# Allegro board Main.brd
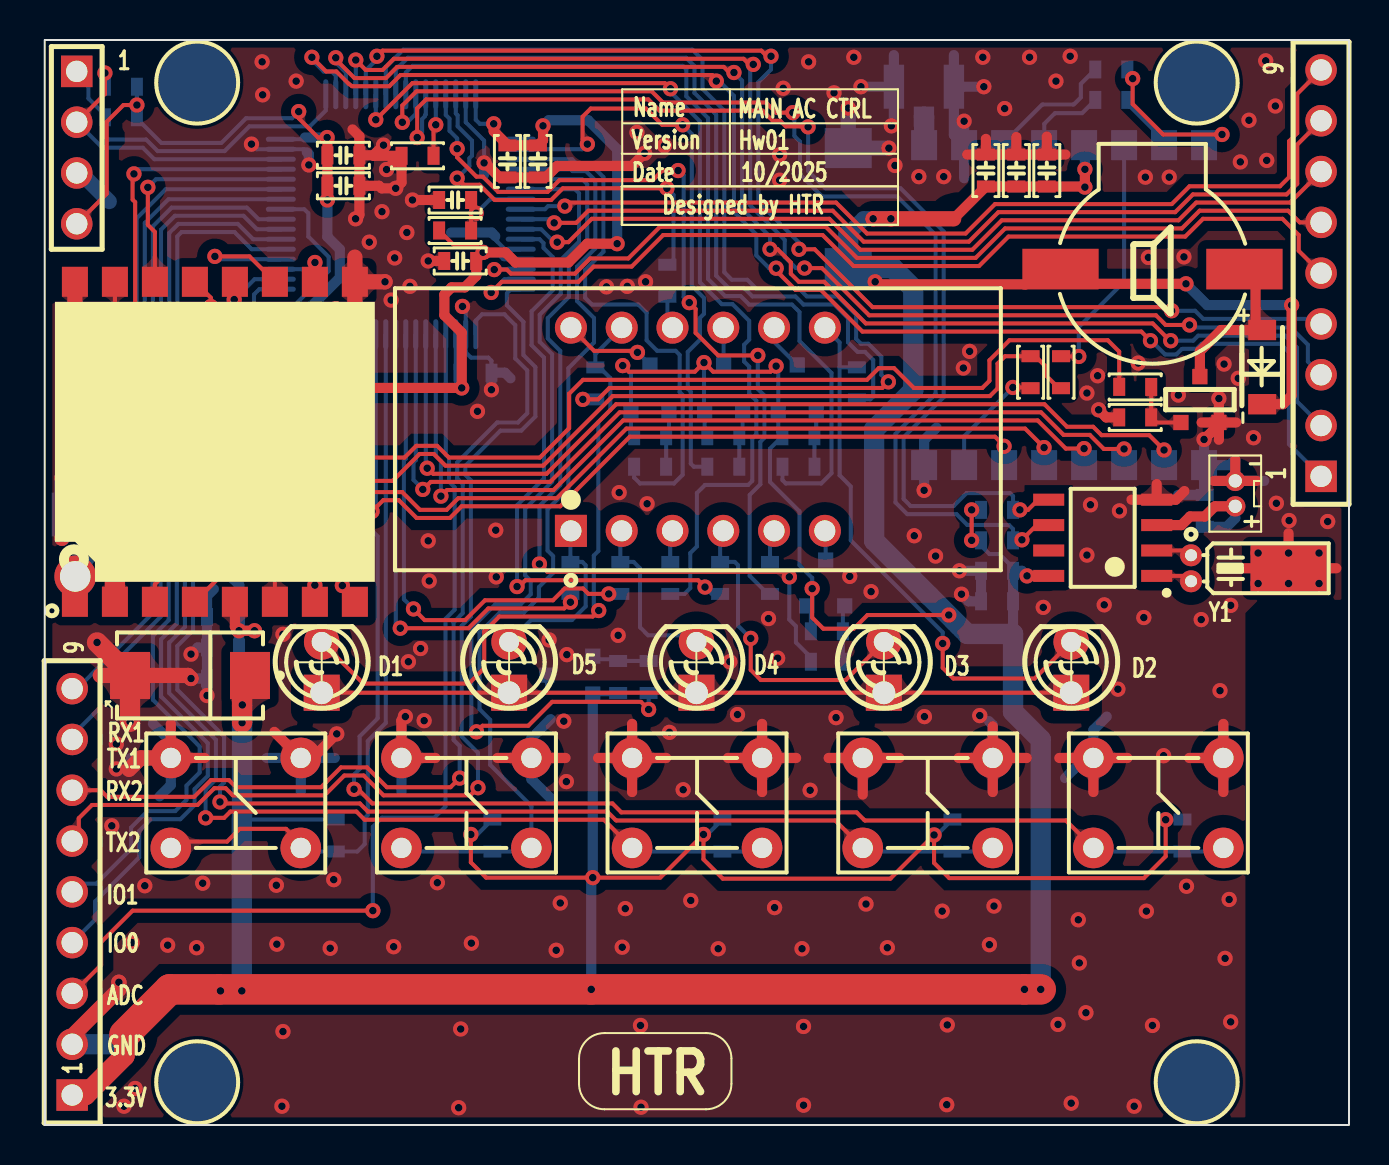
[diagram p0: board, top side]
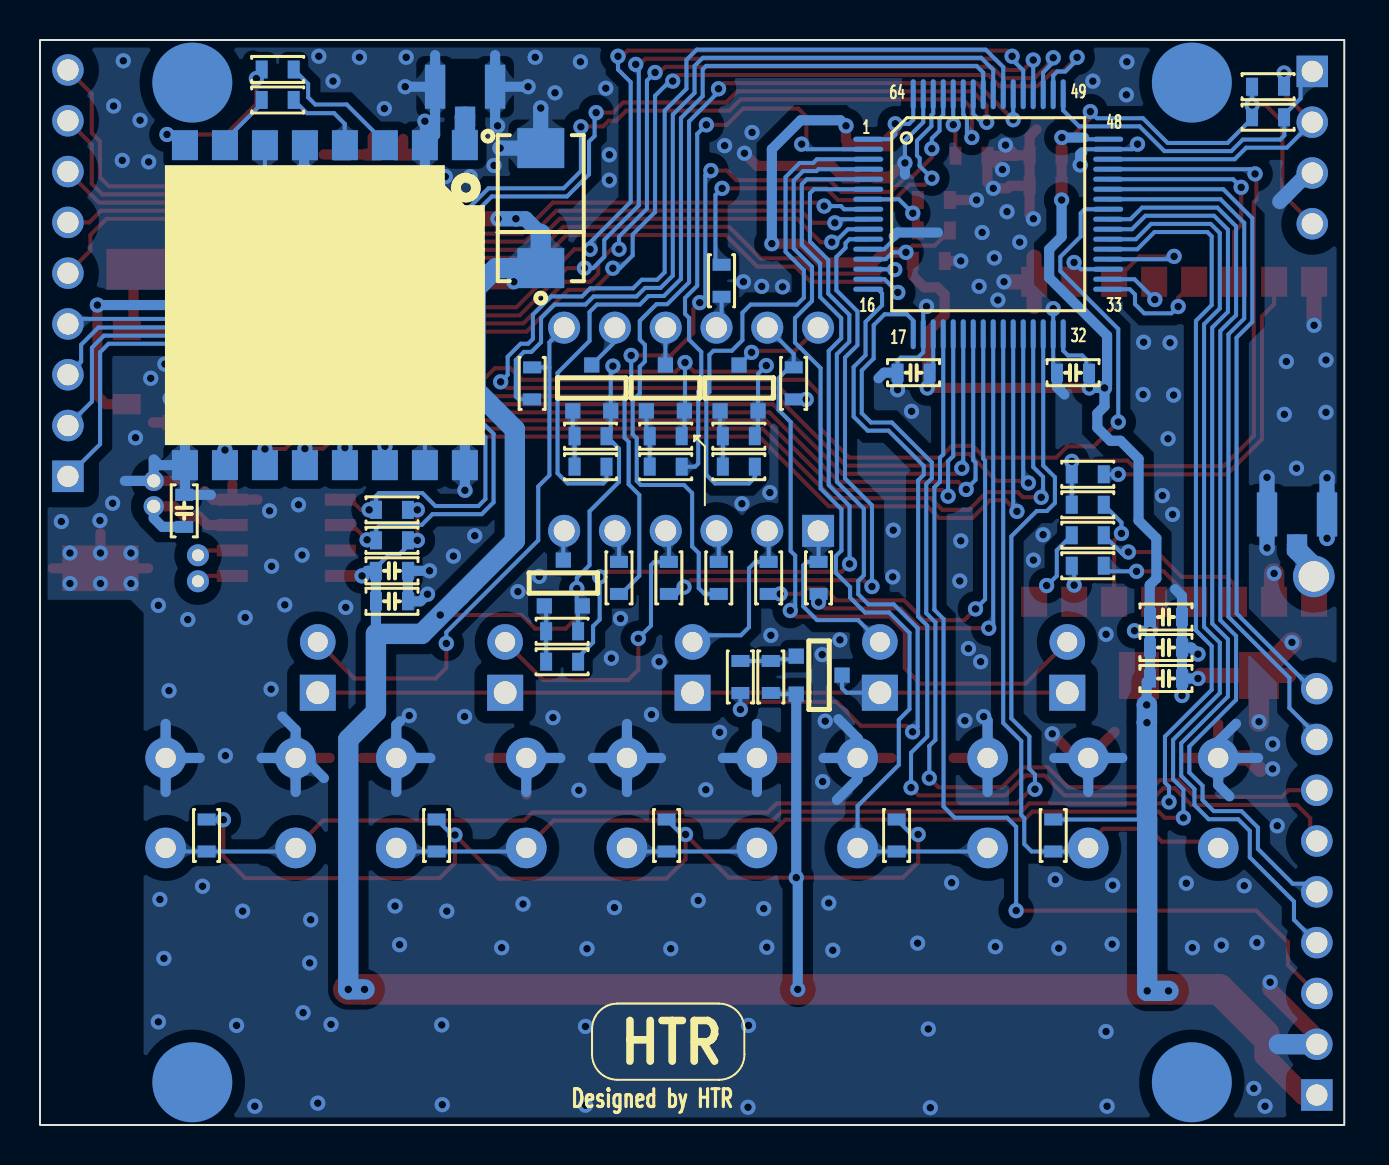
[diagram p1: board, bottom side, seen from below]

Outline 65.23 x 54.25 mm; copper layers: TOP, BOTTOM. Coordinates in mm from the lower left corner of the outline.
Outline path: rectangle 0,0 65.23,54.25

## Design rules (mm)
constraint set DEFAULT: min track width 0.203

## Placement (name value [footprint] x y rotation side)
B1  Through SMD  [BUZZER_SMD]  55.4 42.8 0 top
C1  0.1uF  [C0603]  23.14 48.18 90 top
C2  10uF  [C0603]  24.66 48.18 270 top
C3  0.1uF  [C0603]  20.78 43.21 0 top
C4  0.1uF  [C0603]  13.56 37.62 180 bottom
C5  0.1uF  [C0603]  21.54 37.62 180 bottom
C7  0.1uF  [C0603]  14.94 48.49 180 top
C8  10uF  [C0603]  14.94 46.96 0 top
C10  0.1uF  [C0603]  8.92 25.4 180 bottom
C11  1uF  [C0603]  8.92 23.88 180 bottom
C12  1uF  [C0603]  8.92 22.33 180 bottom
C13  0.1uF  [C0603]  20.52 46.25 0 top
C14  0.1uF  [C0603]  47.62 27.71 180 bottom
C15  1uF  [C0603]  47.62 26.19 0 bottom
C16  1uF  [C0603]  58.01 30.71 90 bottom
C17  100uF  [C2312]  7.26 22.48 180 top
C18  100uF  [C2312]  40.18 45.85 90 bottom
C23  0.1uF  [C0603]  50.11 47.73 90 top
C24  1uF  [C0603]  48.59 47.73 90 top
C25  1uF  [C0603]  47.07 47.73 90 top
D1  3mm  [LED3MM]  13.85 24.16 270 top
D2  3mm  [LED3MM]  51.34 24.16 270 top
D3  3mm  [LED3MM]  41.96 24.16 270 top
D4  3mm  [LED3MM]  32.59 24.16 270 top
D5  3mm  [LED3MM]  23.22 24.16 270 top
D6  1N4148  [SOD_123]  60.88 37.9 270 top
J1  -  [HEADER1X4]  1.6 48.9 180 top
J2  -  [HEADER1X9]  63.83 32.44 90 top
J3  Bat  [HEADER1X2_127_ZH_TH]  59.54 31.57 90 top
J6  -  [HEADER1X9]  1.37 1.5 90 top
NOREF  -  [unnamed]  57.61 2.14 0 top
NOREF#2  -  [#2]  32.61 16.1 90 top
NOREF#3  -  [unnamed]  7.62 52.12 0 top
NOREF#4  -  [unnamed]  7.62 2.14 0 top
NOREF#5  -  [unnamed]  57.61 52.12 0 top
NOREF#6  -  [#2]  10.37 16.47 0 top
NOREF#7  -  [#2]  35.94 23.14 90 top
Q1  MMBT3906  [SOT_23]  31.22 35.71 180 bottom
Q2  MMBT3906  [SOT_23]  34.9 35.71 180 bottom
Q3  MMBT3906  [SOT_23]  38.58 35.71 180 bottom
Q4  MMBT3906  [SOT_23]  40.01 25.96 180 bottom
Q5  MMBT3906  [SOT_23]  27.41 23.44 270 bottom
Q6  MMBT2222  [SOT_23]  56.82 35.13 0 top
R1  10K  [R0603]  20.52 44.73 0 top
R2  10K  [R0603]  18.64 48.46 180 top
R3  10K  [R0603]  3.81 51.92 0 bottom
R4  10K  [R0603]  3.81 50.39 0 bottom
R5  0  [R0603]  12.83 32.54 0 bottom
R6  0  [R0603]  12.83 27.97 0 bottom
R7  0  [R0603]  12.83 29.49 0 bottom
R8  0  [R0603]  12.83 31.01 180 bottom
R9  10K  [R0603]  30.28 34.44 0 bottom
R10  10K  [R0603]  33.93 34.44 0 bottom
R11  10K  [R0603]  37.69 34.44 0 bottom
R12  10K  [R0603]  39.12 24.69 0 bottom
R13  10K  [R0603]  28.68 22.4 90 bottom
R14  2.2K  [R0603]  30.2 22.4 270 bottom
R15  2.2K  [R0603]  30.28 32.92 180 bottom
R16  2.2K  [R0603]  33.93 32.92 180 bottom
R17  2.2K  [R0603]  37.69 32.92 180 bottom
R18  2.2K  [R0603]  39.12 23.16 180 bottom
R19  2.2K  [R0603]  27.53 37.08 270 bottom
R20  2.2K  [R0603]  40.61 37.08 270 bottom
R21  2.2K  [R0603]  33.78 27.36 270 bottom
R22  2.2K  [R0603]  28.78 27.36 270 bottom
R23  2.2K  [R0603]  26.29 27.36 270 bottom
R24  2.2K  [R0603]  31.14 42.21 90 bottom
R25  2.2K  [R0603]  36.27 27.36 270 bottom
R26  2.2K  [R0603]  31.28 27.36 270 bottom
R27  10K  [R0603]  14.55 14.48 270 bottom
R28  10K  [R0603]  22.39 14.48 270 bottom
R29  10K  [R0603]  33.89 14.48 270 bottom
R30  10K  [R0603]  45.39 14.48 270 bottom
R31  10K  [R0603]  56.9 14.48 270 bottom
R32  10K  [R0603]  47.62 30.76 0 bottom
R33  10K  [R0603]  47.62 29.24 0 bottom
R34  0  [R0603]  49.3 37.64 90 top
R35  2.2K  [R0603]  54.53 36.91 0 top
R36  10K  [R0603]  54.53 35.38 180 top
R37  0  [R0603]  53.34 51.26 0 bottom
R38  0  [R0603]  53.34 52.78 0 bottom
R39  0  [R0603]  50.83 37.64 90 top
SW1  Button  [SW_REC_6X6_4P_TH]  9.55 16.1 0 top
SW2  Button  [SW_REC_6X6_4P_TH]  21.09 16.1 0 top
SW3  Button  [SW_REC_6X6_4P_TH]  32.62 16.1 0 top
SW4  Button  [SW_REC_6X6_4P_TH]  44.16 16.1 0 top
SW5  Button  [SW_REC_6X6_4P_TH]  55.69 16.1 0 top
T1  Test_Point_Pwr_60  [TEST_POINT_PWR_60]  1.52 27.43 0 top
U1  STM32F103RD  [LQFP_64]  17.81 45.54 180 bottom
U2  SMD_MINI  [ANTENNA_MOUNT]  2.36 30.53 270 bottom
U3  RFM69HCW_868/RFM22B_433  [RFM22B_S2]  8.51 34.16 90 top
U4  LED  [LED_4_DIGIT]  32.66 34.79 90 top
U5  BQ32000  [SOIC8]  52.91 29.36 180 top
U6  SMD_MINI  [ANTENNA_MOUNT]  43.97 51.92 270 bottom
U7  RFM69HCW_868/RFM22B_433  [RFM22B_S2]  50.98 41 270 bottom
Y1  32.768kHz  [CRYTAL32KHZ]  57.33 27.84 270 top

## Library data of the parts
B1 = BUZZER
C1-C5 C7 C8 C10-C16 C23-C25 = NPOL_CAP: User Part Number: ***
C17 C18 = POL_CAP
D1-D5 = LED
D6 = DIODE
J1 = HEADER1X4
J2 J6 = HEADER1X9
J3 = HEADER1X2
Q1-Q5 = PNP_CBE
Q6 = BJT_NPN
R1-R39 = RES: User Part Number: ***
SW1-SW5 = SW_PB_SPST_4
T1 = TestPoint
U1 = STM32F103_0
U2 U6 = ANT_SMD_MINI
U3 U7 = RFM69HCW
U4 = LED_4_DIGIT
U5 = DS1307_8P
Y1 = XM_SM_2

## Footprints (pads in the part's own frame, mm; a bottom-side part is the same pattern mirrored in y, then rotated)
ANTENNA_MOUNT
  rect 2.2x1.02 smd: 1(0,1.5) 2(0,-1.5)
  rect 1.016x1.016 smd: 3(1.5,0)
BUZZER_SMD
  rect 3.81x2.032 smd: 1(-4.6,0) 2(4.6,0)
C0603
  rect 0.6x0.9 smd: 1(-0.8,0) 2(0.8,0)
C2312
  rect 2x2.35 smd: 1(-3,0) 2(3,0)
CRYTAL32KHZ
  round 1.1 hole 0.6: 1(-0.65,0) 2(0.65,0)
  rect 2.286x3.81 smd: 3(0,4.877)
HEADER1X2_127_ZH_TH
  round 1.016 hole 0.66: 1(-0.635,0) 2(0.635,0)
HEADER1X4
  rect 1.575x1.575 hole 1.067: 1(0,-3.79)
  round 1.575 hole 1.067: 2(0,-1.25) 3(0,1.29) 4(0,3.83)
HEADER1X9
  rect 1.575x1.575 hole 1.067: 1(0,0)
  round 1.575 hole 1.067: 2(2.54,0) 3(5.08,0) 4(7.62,0) 5(10.16,0) 6(12.7,0) 7(15.24,0) 8(17.78,0) 9(20.32,0)
LED3MM
  rect 1.801x1.801 hole 1.143: 1(2.54,0)
  round 1.778 hole 1.001: 2(0,0)
LED_4_DIGIT
  rect 1.6x1.6 hole 1.05: 1(-5.08,6.35)
  round 1.6 hole 1.05: 2(-5.08,3.81) 3(-5.08,1.27) 4(-5.08,-1.27) 5(-5.08,-3.81) 6(-5.08,-6.35) 7(5.08,-6.35) 8(5.08,-3.81) 9(5.08,-1.27) 10(5.08,1.27) 11(5.08,3.81) 12(5.08,6.35)
LQFP_64
  oval 1.5x0.254 smd: 1(-6,3.75) 2(-6,3.25) 3(-6,2.75) 4(-6,2.25) 5(-6,1.75) 6(-6,1.25) 7(-6,0.75) 8(-6,0.25) 9(-6,-0.25) 10(-6,-0.75) 11(-6,-1.25) 12(-6,-1.75) 13(-6,-2.25) 14(-6,-2.75) 15(-6,-3.25) 16(-6,-3.75) 33(6,-3.75) 34(6,-3.25) 35(6,-2.75) 36(6,-2.25) 37(6,-1.75) 38(6,-1.25) 39(6,-0.75) 40(6,-0.25) 41(6,0.25) 42(6,0.75) 43(6,1.25) 44(6,1.75) 45(6,2.25) 46(6,2.75) 47(6,3.25) 48(6,3.75)
  oval 0.254x1.5 smd: 17(-3.75,-6) 18(-3.25,-6) 19(-2.75,-6) 20(-2.25,-6) 21(-1.75,-6) 22(-1.25,-6) 23(-0.75,-6) 24(-0.25,-6) 25(0.25,-6) 26(0.75,-6) 27(1.25,-6) 28(1.75,-6) 29(2.25,-6) 30(2.75,-6) 31(3.25,-6) 32(3.75,-6) 49(3.75,6) 50(3.25,6) 51(2.75,6) 52(2.25,6) 53(1.75,6) 54(1.25,6) 55(0.75,6) 56(0.25,6) 57(-0.25,6) 58(-0.75,6) 59(-1.25,6) 60(-1.75,6) 61(-2.25,6) 62(-2.75,6) 63(-3.25,6) 64(-3.75,6)
R0603
  rect 0.6x0.9 smd: 1(-0.8,0) 2(0.8,0)
RFM22B_S2
  rect 1.501x1.301 smd: 1(-8,7) 2(-8,5) 3(-8,3) 4(-8,1) 5(-8,-1) 6(-8,-3) 7(-8,-5) 8(-8,-7) 9(8,-7) 10(8,-5) 11(8,-3) 12(8,-1) 13(8,1) 14(8,3) 15(8,5) 16(8,7)
SOD_123
  rect 1.016x1.397 smd: 1(-1.854,0) 2(1.854,0)
SOIC8
  rect 1.55x0.6 smd: 1(-2.7,1.905) 2(-2.7,0.635) 3(-2.7,-0.635) 4(-2.7,-1.905) 5(2.7,-1.905) 6(2.7,-0.635) 7(2.7,0.635) 8(2.7,1.905)
SOT_23
  rect 0.762x0.762 smd: 1(0,0) 2(1.9,0) 3(0.95,2.291)
SW_REC_6X6_4P_TH
  round 2.032 hole 1.016: 1(-3.25,2.25) 2(3.25,2.25) 3(3.25,-2.25) 4(-3.25,-2.25)
TEST_POINT_PWR_60
  round 2.083 hole 1.524: 1(0,0)
unnamed
  round 0 hole 3.2: (0,0)

## Nets
+3.3V: B1.1 C1.2 C2.1 C3.2 C4.2 C5.2 C7.2 C8.1 C10.1 C11.1 C12.1 C14.1 C15.2 C17.1 C18.1 C23.1 C24.1 C25.1 D6.2(CATHODE) J1.4 J6.1 Q1.2 Q2.2 Q3.2 Q4.2 Q5.2 R1.1 R3.2 R4.2 R9.1 R10.1 R11.1 R12.1 R13.1 R27.1 R28.1 R29.1 R30.1 R31.1 R32.1 R33.1 U1.1 U1.13 U1.19 U1.32 U1.48 U1.64 U3.5(VCC) U5.8 U7.5(VCC)
GND: C1.1 C2.2 C3.1 C4.1 C5.1 C7.1 C8.2 C10.2 C11.2 C12.2 C13.1 C14.2 C15.1 C16.2 C17.2 C18.2 C23.2 C24.2 C25.2 J1.3 J3.2 J6.2 Q6.2 R2.2 R36.2 SW1.1 SW1.2 SW2.1 SW2.2 SW3.1 SW3.2 SW4.1 SW4.2 SW5.1 SW5.2 U1.12 U1.18(VSS_4) U1.31 U1.47 U1.63 U2.1 U2.2(GND1) U3.2 U3.9 U3.16 U5.4 U6.1 U6.2(GND1) U7.2 U7.9 U7.16 Y1.3
BOOT0: R2.1 U1.60
BTN1: R27.2 SW1.3 SW1.4 U1.26
BTN2: R28.2 SW2.3 SW2.4 U1.4
BTN3: R29.2 SW3.3 SW3.4 U1.38
BTN4: R30.2 SW4.3 SW4.4 U1.37
BTN5: R31.2 SW5.3 SW5.4 U1.30
D: J6.8 U1.42
IO0: J6.4 U1.39
IO1: J6.5 U1.40
LED_A: R19.2 U1.55
LED_B: R20.2 U1.56
LED_C: R21.2 U1.11
LED_CTRL0: R15.2 U1.3
LED_CTRL1: R16.2 U1.2
LED_CTRL2: R17.2 U1.57
LED_CTRL3: R18.2 U1.5
LED_CTRL4: R14.2 U1.6
LED_D: R22.2 U1.24
LED_DOT: R26.2 U1.54
LED_E: R23.2 U1.25
LED_F: R24.2 U1.62
LED_G: R25.2 U1.61
LIGHT_SENSOR: J6.3 U1.20
N15651594_RF: T1.1(T) U2.3 U3.1
N15651594_RF1: U6.3 U7.1
N15651640_RF: R5.1 U3.15
N15651640_RF1: R34.1 U7.15
N15651662_RF: R7.1 U3.3
N15651662_RF1: R38.1 U7.3
N15651688_RF: R6.1 U3.4
N15651688_RF1: R37.1 U7.4
N15651780_RF: R8.2 U3.6
N15651780_RF1: R39.2 U7.6
N15651834_RF: R6.2 U3.7
N15651834_RF1: R37.2 U7.7
N15651858_RF: R7.2 U3.8
N15651858_RF1: R38.2 U7.8
OUT_SEN1: J2.9 U1.8
OUT_SEN2: J2.8 U1.9
OUT_SEN3: J2.7 U1.10
OUT_SEN4: J2.6 U1.14
R: J6.9 U1.43
RELAY1: J2.3 U1.52
RELAY2: J2.2 U1.51
RELAY3: J2.1 U1.50
RELAY4: J2.4 U1.53
RF1_IO0: R5.2 R8.1 U1.45
RF1_IO1: U1.44 U3.14
RF2_IO0: R34.2 R39.1 U1.28
RF2_IO1: U1.27 U7.14
SPI1_MISO: U1.22 U7.10
SPI1_MOSI: U1.23 U7.11
SPI1_SCK: U1.21 U7.12
SPI1_SS: U1.29 U7.13
SPI2_MISO: U1.35 U3.10
SPI2_MOSI: U1.36 U3.11
SPI2_SCK: U1.34 U3.12
SPI2_SS: U1.33 U3.13
SWCLK: J1.1 R4.1 U1.49
SWDIO: J1.2 R3.1 U1.46
UART_RX: J6.7 U1.17
UART_TX: J6.6 U1.16
ZDET: J2.5 U1.15
N00082: D1.2(CATHODE) R19.1 U4.11
N00088: D2.2(CATHODE) R20.1 U4.7
N00094: D3.2(CATHODE) R21.1 U4.4
N00100: D4.2(CATHODE) R22.1 U4.2
N00106: D5.2(CATHODE) R23.1 U4.1
N00112: R24.1 U4.10
N00118: R25.1 U4.5
N15478798: B1.2(-) D6.1 Q6.3(E)
N15478854: Q6.1 R35.2 R36.1
N15504963: Q1.3(E) U4.12
N15504972: Q2.3(E) U4.9
N15505070: Q3.3(E) U4.8
N15505077: Q4.3(E) U4.6(LED_4)
N15565455: Q1.1 R9.2 R15.1
N15565519: Q2.1 R10.2 R16.1
N15565583: Q3.1 R11.2 R17.1
N15565649: Q4.1 R12.2 R18.1
N15566232: Q5.1 R13.2 R14.1
N15566328: D1.1 D2.1 D3.1 D4.1 D5.1 Q5.3(E)
N15566838: R26.1 U4.3
N15629265: R35.1 U1.41
N15629501: R32.2 U1.59 U5.5
N15629505: R33.2 U1.58 U5.6
N15649130: U5.1 Y1.2(XTAL2)
N15649228: U5.2(X2) Y1.1
N15649288: C16.1 J3.1 U5.3
N15675820: C13.2 R1.2 U1.7

Pads without a net: U5 7

## Via types
v1: diameter 0.762, hole 0.381, TOP to BOTTOM, 334 vias

## Routing (per net, layer and track width the routed paths; a pad name or vN(x,y) marks a point on that pad's centre or on a via; arc(x,y) is an arc through that point)
+3.3V: length 396.2
  TOP w0.203: v1(12.7,50.67) 12.7,50.34 13.67,49.38 v1(14.12,49.38) ; v1(36.58,37.95) 36.3,37.67 33.43,37.67 v1(32.97,38.13) 32.51,37.67 29.21,37.67 v1(28.91,37.97) ; R1.1 20.48,43.97 21.58,43.97 v1(21.92,43.64) 21.92,43.55 C3.2 ; v1(46.35,30.76) v1(46.35,29.24) ; v1(56.06,15.27) 56.06,13.44 54.97,12.34 45.24,12.34 44.48,13.11 v1(44.48,14.5) 42.29,12.32 33.91,12.32 32.94,13.28 v1(32.94,14.53) 30.78,12.37 v1(27.41,12.37) 22.07,12.37 21.31,13.13 v1(21.31,14.53) ; v1(4.61,51) 3.94,51 3.1,50.16 3.1,46.56 J1.4 ; v1(45.21,25.5) 41.15,25.5 40.46,24.82 38.94,24.82 38.38,25.37 v1(38.38,26.82)
  TOP w0.508: v1(41.53,42.16) 41.66,42.04 49.05,42.04 49.81,42.8 B1.1 51.53,42.06 v1(57.07,42.06) ; 8.71,6.78 v1(8.79,6.71) v1(9.86,6.71) ; v1(10.49,24.71) v1(9.72,24.71) 9.51,24.92 U3.5 ; v1(11.99,36.86) v1(12.75,36.86) v1(20.85,36.86) 20.85,39.62 19.99,40.49 19.99,41.53 20.35,41.88 21.01,41.88 21.58,42.46 C3.2 21.58,43.29 v1(21.92,43.64) 22.01,43.55 22.03,43.55 22.11,43.63 23.04,43.63 23.55,43.13 26.19,43.13 27.13,44.07 v1(28.63,44.07) ; v1(14.12,49.38) 14.14,49.38 C7.2 C8.1 v1(14.14,46.25) ; 24.92,49.96 v1(24.92,49.96) ; 24.92,49.96 24.93,49.95 24.93,49.74 ; 24.92,49.96 24.92,49.24 C2.1 C1.2 23.14,49.01 22.45,49.7 v1(22.45,50.06) ; 45.45,45.31 C25.1 C24.1 C23.1 51.99,46.93 v1(52.02,46.9) v1(52.02,47.79) ; U5.8 v1(49.12,27.46) ; v1(62.36,41) 62.36,36.47 61.93,36.04 D6.2
  TOP w0.762: v1(41.43,45.31) v1(42.32,45.31) 45.45,45.31
  TOP w1.016: J6.1 2.03,1.5 3.99,3.45 3.99,4.52 ; C17.1 9.87,22.08 v1(9.87,20.12)
  TOP w1.524: 3.99,4.52 6.25,6.78 v1(27.33,6.78) v1(49,6.78) v1(49.81,6.78)
  BOTTOM w0.203: v1(32.97,38.13) 32.97,35.74 Q2.2 33,34.58 R10.1 ; v1(46.35,29.24) R33.1 46.82,28.97 47.24,28.55 47.74,28.55 48.43,27.87 C14.1 ; U1.64 21.56,50.27 21.76,50.06 v1(22.45,50.06) 22.45,49.53 22.69,49.29 U1.1 ; v1(28.91,37.97) 29.32,37.56 Q1.2 29.32,34.6 R9.1 ; R31.1 56.88,15.27 v1(56.06,15.27) ; R29.1 33.14,14.53 v1(32.94,14.53) ; C5.2 20.56,37.8 U1.19 ; R13.1 28.62,21.54 Q5.2 ; v1(21.92,43.64) 22.59,43.64 22.92,43.31 22.98,43.29 U1.13 ; 44.24,26.46 45.19,25.5 v1(45.21,25.5) ; R12.1 38.32,25.75 Q4.2 38.38,26.23 v1(38.38,26.82) 38.38,27.36 37.74,27.99 37.74,30.68 36.27,32.16 36.27,33.82 R11.1 36.68,34.65 Q3.2 36.68,37.71 36.58,37.82 v1(36.58,37.95) ; v1(21.31,14.53) 21.64,14.53 R28.1 ; R30.1 44.62,14.5 v1(44.48,14.5) ; R27.1 9.87,15.28 ; R32.1 v1(46.35,30.76) ; C4.2 12.9,37.76 12.9,38.28 13.11,38.48 13.82,38.48 14.06,38.72 U1.32 ; 13.01,49.38 12.93,49.29 U1.48 ; v1(12.7,50.67) 12.37,50.34 10.07,50.34 8.83,49.11 5.84,49.11 4.61,50.33 R4.2 v1(4.61,51) R3.2
  BOTTOM w0.508: v1(27.33,6.78) 27.33,12.29 v1(27.41,12.37) Q5.2 ; v1(52.02,46.9) v1(52.02,47.79) 52.02,48.95 U7.5 ; C4.2 12.75,37.6 v1(12.75,36.86) v1(11.99,36.86) ; v1(11.99,36.86) 11.99,36.91 11.86,37.03 11.86,39.47 14.76,42.37 14.76,43.79 14.14,44.41 v1(14.14,46.25) ; v1(11.99,36.86) 11.99,35.94 12.35,35.58 12.35,34.86 11.7,34.21 11.19,34.21 10.29,33.31 10.29,30.23 9.4,29.34 9.4,27.33 9.73,27 9.73,25.41 C10.1 v1(9.72,24.71) ; v1(9.72,24.71) C11.1 C12.1 9.88,22.16 v1(9.88,21.01) ; v1(9.72,24.71) v1(10.49,24.71) ; 48.43,24.56 C15.2 C14.1 48.87,27.71 v1(49.12,27.46) ; v1(20.85,36.86) 20.74,36.97 C5.2 ; v1(62.36,41) 58.14,41 v1(57.07,42.06) ; v1(41.53,42.16) 40.87,42.16 C18.1 ; v1(28.63,44.07) 28.63,48.79 27.18,50.24 25.2,50.24 v1(24.92,49.96) ; v1(14.12,49.38) 13.01,49.38 ; 9.86,15.29 9.87,15.28
  BOTTOM w0.762: 40.18,44.55 40.94,45.31 v1(41.43,45.31) v1(42.32,45.31)
  BOTTOM w1.016: 9.88,20.13 v1(9.87,20.12) ; v1(9.87,20.12) 9.87,15.28 ; v1(9.87,20.12) 9.87,20.99 v1(9.88,21.01) ; v1(8.79,6.71) v1(9.86,6.71) 9.86,15.29 ; v1(49,6.78) v1(49.81,6.78) 49.81,19.28 48.43,20.66 48.43,24.56 46.14,24.56 44.24,26.46 41.48,29.22 41.48,34.78 43.43,36.74 43.43,41.83 42.42,42.85 C18.1 40.18,44.55
GND: length 253.7
  TOP w0.508: Q6.2 59.58,35.13 ; Q6.2 58.72,35.02 ; Q6.2 v1(58.72,36.33) ; Q6.2 57.86,35.13 ; SW4.1 39.21,18.35 ; SW4.1 42.74,18.35 ; SW4.1 40.91,16.52 ; SW3.2 35.87,16.65 ; SW3.2 37.58,18.35 ; SW3.2 35.87,20.06 ; SW3.2 34.17,18.35 ; SW5.1 54.14,18.35 ; SW5.1 50.74,18.35 ; SW5.1 52.44,16.65 ; 26.04,18.35 SW2.2 22.64,18.35 ; 64.59,27.84 Y1.3 ; Y1.3 59.82,27.84 ; Y1.3 v1(62.2,28.6) 62.2,29.59 ; C25.2 47.07,49.31 ; C25.2 46.13,48.53 ; C25.2 C24.2 ; 16.43,48.49 v1(16.94,49) ; 16.43,48.49 C7.1 ; 16.43,48.49 16.46,48.46 17.78,48.46 ; SW4.2 47.41,19.93 ; SW4.2 45.71,18.35 ; SW4.2 47.41,16.65 ; SW4.2 49.11,18.35 ; 57,31.7 56.57,31.27 U5.4 ; SW3.1 27.67,18.35 ; SW3.1 29.37,16.65 ; SW3.1 31.08,18.35 ; SW3.1 29.37,20.06 ; 6.3,20.06 SW1.1 8.01,18.35 ; J3.2 59.54,33.27 ; J3.2 60.6,32.21 ; J3.2 58.47,32.21 ; C24.2 48.59,49.4 ; C24.2 C23.2 ; 15.39,49.78 15.74,49.44 C7.1 ; v1(30,48.59) 29.36,47.96 25.63,47.96 25.06,47.38 C2.2 C1.1 22.75,47.38 22.02,48.11 v1(21.97,48.11) ; 19.54,18.35 SW2.1 17.84,20.23 v1(18.03,20.42) ; C7.1 C8.2 ; 17.78,48.46 R2.2 17.84,47.13 v1(17.55,46.84) 16.85,46.84 16.72,46.96 C8.2 ; 17.78,48.46 v1(17.09,47.78) ; 58.72,35.02 58.72,34.26 ; 58.72,35.02 v1(57.98,34.28) ; U5.4 55.61,32.05 ; U5.4 54.35,31.27 ; C23.2 51.05,48.53 ; C23.2 50.11,49.43 ; v1(52.7,35.76) 53.09,35.38 R36.2 ; C8.2 15.74,45.5 v1(15.54,45.31) ; C13.1 v1(18.39,46.25) ; v1(14.61,19.56) 13.4,18.35 SW1.2 12.79,18.35 11.48,19.66 ; SW5.2 57.24,18.35 ; SW5.2 58.94,16.65 ; SW5.2 58.94,20.06 ; C3.1 v1(19.18,43.21)
  TOP w0.762: U3.9 15.51,40.93 ; U3.9 v1(17.02,42.16) ; U3.9 15.51,43.4 ; 4.22,17.78 4.79,18.35 SW1.1 ; v1(7.32,22.33) 7.16,22.48 C17.2 2.78,22.48 ; U3.16 v1(1.51,39.99) ; v1(3.71,7.14) 3.71,6.78 1.37,4.45 J6.2
  TOP w1.016: v1(2.62,24.13) 4.26,22.48 C17.2 v1(4.26,20.16) ; U3.2 v1(3.51,27.58)
  BOTTOM w0.203: v1(21.97,48.11) 21.97,49.23 21.06,50.14 U1.63 ; U1.12 23.01,43.79 22.63,44.17 ; C5.1 22.34,38.21 22.18,38.37 21.32,38.37 21.06,38.63 U1.18 21.06,40.77 v1(20.89,40.93) ; 22.63,44.17 22.53,44.27 22.53,44.45 22.63,44.35 22.63,44.17 ; C4.1 14.56,37.81 U1.31 v1(14.56,40.82) ; 13.11,48.64 12.96,48.79 U1.47 10.59,48.79 v1(10.34,49.05) ; 47.41,20 47.41,20.06
  BOTTOM w0.508: U7.2 v1(45.98,50.19) ; U7.2 45.98,47.34 ; U7.2 45.47,49.51 U6.2 ; C11.2 C10.2 8.12,26.45 8.46,26.8 ; C11.2 7.65,23.88 v1(7.32,23.55) ; C11.2 C12.2 ; 23.29,37.34 23.01,37.62 C5.1 v1(22.34,36.77) ; 47.22,20.19 47.41,20 SW4.2 ; U6.1 42.47,53.5 ; U6.1 v1(40.82,51.92) ; U6.1 42.47,50.09 v1(42.34,49.96) ; 13.11,48.64 13.21,48.54 v1(13.21,48.01) ; SW1.1 6.3,17 5.74,16.43 ; SW1.1 4.31,18.35 ; SW1.1 6.3,19.17 5.41,20.07 ; U7.9 v1(57.98,34.28) ; U7.9 59.26,33 59.54,33.27 J3.2 60.99,32.21 ; U7.9 57.98,31.54 C16.2 56.68,31.51 ; SW5.2 58.94,16.65 ; SW5.2 58.94,20.06 ; SW5.2 57.24,18.35 ; SW5.1 54.14,18.35 ; SW5.1 52.44,16.65 ; SW5.1 52.44,19.75 53.11,20.42 ; SW5.1 52.03,18.35 51.03,17.35 ; SW4.2 45.71,18.35 ; SW4.2 47.41,16.65 ; SW3.2 35.87,16.65 ; SW3.2 37.58,18.35 ; SW3.2 35.87,20.06 ; SW3.2 34.17,18.35 ; 40.91,16.65 SW4.1 39.21,18.35 ; 17.84,16.65 SW2.1 17.84,20.23 v1(18.03,20.42) ; SW3.1 29.37,16.65 ; SW3.1 29.37,20.06 ; SW3.1 31.08,18.35 ; SW2.2 26.04,18.35 ; SW2.2 24.34,19.33 25.3,20.29 ; SW2.2 24.34,17.29 25.37,16.26 ; v1(45.85,26.54) 46.2,26.19 C15.1 C14.2 v1(45.75,27.71) ; U6.2 45.47,53.5 ; U6.2 v1(46.96,51.92) ; 20.32,44.63 22.35,44.63 22.53,44.45 ; 44.6,34.87 43.98,34.25 U7.16 v1(43.98,31.74) ; SW1.2 14.51,18.35 ; SW1.2 12.8,16.65 ; SW1.2 11.1,18.35 ; v1(21.97,48.11) 21.97,47.52 ; C12.2 v1(8.12,21.48) ; C12.2 v1(7.32,22.33) ; 14,36.53 14.36,36.89 C4.1
  BOTTOM w0.762: v1(3.86,32.38) U2.2 v1(3.86,28.86) ; v1(42.22,48.85) C18.2 v1(40.18,50.85) ; J1.3 1.8,47.6 3.23,46.18 ; v1(0.86,29.34) U2.1 v1(0.86,32.36)
  BOTTOM w1.016: J6.2 3.28,4.04
  vias: v1(0.91,38.25) v1(0.91,35.64) v1(2.39,32.84) v1(2.9,38.18) v1(3,35.53) v1(3.35,14.96) v1(3.58,19.05) v1(3.58,17.81) v1(3.96,0.94) v1(4.37,9.12) v1(4.52,1.83) v1(5,11.96) v1(6.15,8.99) v1(7.59,8.86) v1(7.9,12.09) v1(8.53,36.5) v1(8.59,30.53) v1(8.71,39.12) v1(8.81,34.32) v1(9.09,31.47) v1(10.03,39.14) v1(10.06,36.53) v1(10.87,53.16) v1(10.9,51.51) v1(11.58,11.99) v1(11.61,9.04) v1(11.91,24.54) v1(11.91,4.67) v1(11.86,0.94) v1(12.57,52.2) v1(14.27,8.84) v1(14.45,12.27) v1(15.06,29.51) v1(15.54,28.24) v1(16.23,44.15) v1(16.87,45.67) v1(17.32,41.25) v1(17.45,8.92) v1(17.5,43.36) v1(18.11,44.63) v1(18.19,23.16) v1(18.26,41.94) v1(18.8,23.83) v1(18.97,20.22) v1(19.18,29.21) v1(19.23,27.2) v1(19.63,12.12) v1(20.7,0.86) v1(20.8,4.8) v1(21.34,9.09) v1(21.64,35.69) v1(22.56,29.74) v1(22.58,27.41) v1(25.22,24.26) v1(25.58,8.74) v1(25.78,11.1) v1(25.96,20.19) v1(26.11,23.52) v1(26.09,17.17) v1(28.09,41.91) v1(28.73,31.62) v1(28.68,24.49) v1(28.88,8.89) v1(29.03,10.82) v1(29.13,41.94) v1(29.62,49.63) v1(29.79,4.98) v1(29.82,0.89) v1(30.05,42.16) v1(30.12,31.06) v1(30.99,48.97) v1(31.24,19.63) v1(31.93,16.76) v1(32.31,11.23) v1(33.68,8.81) v1(34.26,23.16) v1(34.65,20.52) v1(36.2,25.32) v1(36.5,10.87) v1(36.65,23.34) v1(36.75,48.51) v1(36.75,47.24) v1(36.93,51.84) v1(37.87,8.81) v1(37.95,4.93) v1(37.95,0.99) v1(38.2,53.16) v1(38.28,16.74) v1(39.47,51.61) v1(39.57,20.37) v1(40.26,27.43) v1(40.46,53.39) v1(41.07,11.05) v1(41.33,26.67) v1(42.14,8.86) v1(42.52,47.98) v1(43.48,29.46) v1(43.71,47.42) v1(43.99,20.42) v1(44.55,28.45) v1(44.88,10.69) v1(44.96,47.42) v1(45.14,5) v1(45.11,1.02) v1(45.94,37.85) v1(46.25,38.68) v1(46.76,20.47) v1(46.91,53.39) v1(47.24,9.02) v1(47.47,10.95) v1(48.01,50.83) v1(49.25,53.39) v1(49.94,25.88) v1(50.57,52.2) v1(50.67,5.03) v1(51.28,53.44) v1(51.33,1.09) v1(51.69,10.26) v1(51.74,8.1) v1(52.12,36.6) v1(52.12,28.5) v1(52.07,5.61) v1(52.3,31.01) v1(52.65,37.47) v1(52.98,26.01) v1(53.64,27.94) v1(53.75,30.71) v1(53.67,21.79) v1(54.48,0.94) v1(54.69,38.1) v1(55.04,47.4) v1(54.97,25.37) v1(55.09,10.69) v1(55.19,43.38) v1(55.4,4.98) v1(55.96,18.47) v1(56.24,47.4) v1(56.69,36.5) v1(56.97,43.41) v1(57.1,11.94) v1(57.84,25.27) v1(58.78,21.72) v1(58.98,38.05) v1(59.03,8.33) v1(59.23,11.28) v1(59.31,25.98) v1(59.31,5.16) v1(59.69,37.34) v1(59.79,48.16) v1(60.22,50.24) v1(60.45,34.37) v1(60.68,28.6) v1(60.68,27.08) v1(61.06,53.21) v1(61.11,48.23) v1(61.54,50.95) v1(61.59,31.09) v1(62.23,30.23) v1(62.2,27.08) v1(63.73,28.6) v1(63.73,27.08) v1(64.16,30.18)
BOOT0: length 3.1
  TOP w0.203: v1(19.56,50.02) 19.44,49.9 R2.1
  BOTTOM w0.203: U1.60 v1(19.56,50.02)
BTN1: length 36.8
  TOP w0.203: SW1.3 12.8,14.07 12.06,14.81 9.75,14.81 9.12,14.17 6.62,14.17 SW1.4
  BOTTOM w0.203: SW1.3 12.98,13.68 R27.2 15.63,13.68 16,14.05 16,15.34 16.15,15.49 16.15,19.2 17.06,20.1 U1.26
BTN2: length 49.1
  BOTTOM w0.203: SW2.4 18.01,13.68 R28.2 24.16,13.68 SW2.3 24.34,15.95 22.28,18.01 22.28,20.26 21.74,20.79 21.74,24.61 22.76,25.63 23.97,25.63 24.71,26.37 24.71,26.9 25.43,27.61 25.43,28.45 25.15,28.73 25.15,30.79 26.19,31.83 26.19,37.85 27.47,39.13 27.47,40.35 26.62,41.2 26.62,42.92 27.53,43.83 27.53,47.23 27.06,47.7 26.39,47.7 26.3,47.79 U1.4
BTN3: length 66
  TOP w0.203: v1(8.04,15.36) 8.97,15.36 9.28,15.67 15.59,15.67 16,15.27 27.96,15.27 SW3.4
  BOTTOM w0.203: v1(8.04,15.36) 8.04,16.77 8.56,17.29 8.56,19.26 6.22,21.6 6.22,24.12 7.01,24.91 7.01,40.04 6.22,40.83 6.22,44.6 6.68,45.06 9.66,45.06 10.42,44.29 U1.38 ; SW3.3 35.7,13.68 R29.2 29.55,13.68 SW3.4
BTN4: length 75.3
  TOP w0.203: v1(8.76,16.15) 8.84,16.08 15.76,16.08 16.16,15.67 28.13,15.67 28.54,15.26 28.59,15.23 39.54,15.23 SW4.4
  BOTTOM w0.203: SW4.4 41.08,13.68 R30.2 47.23,13.68 SW4.3 ; v1(8.76,16.15) 8.76,16.92 8.97,17.12 8.97,19.43 6.63,21.76 6.63,23.95 7.42,24.74 7.42,40.21 6.63,41 6.63,44.43 6.85,44.65 9.49,44.65 10.35,43.79 U1.37
BTN5: length 69.5
  TOP w0.203: SW5.4 51.07,15.23 41.02,15.23 40.97,15.26 40.6,15.63 28.84,15.63 28.39,16.08 16.38,16.08 15.67,16.79 v1(15.47,16.79)
  BOTTOM w0.203: SW5.3 58.77,13.68 R31.2 52.62,13.68 SW5.4 ; U1.30 15.06,32.98 14.47,32.39 14.47,31.1 14.87,30.7 15.38,30.7 16.65,29.43 16.65,20.33 15.75,19.43 15.75,17.81 15.47,17.53 v1(15.47,16.79)
D: length 35.3
  BOTTOM w0.203: U1.42 6.19,46.29 5,45.11 5,40.33 5.79,39.54 5.79,25.41 2.75,22.37 2.74,22.36 2.74,20.85 1.37,19.48 J6.8
IO0: length 47.5
  BOTTOM w0.203: U1.39 10.61,44.79 9.94,45.47 6.51,45.47 5.82,44.77 5.82,40.66 6.6,39.88 6.6,25.07 5.82,24.29 5.82,21.43 8.15,19.09 8.15,17.46 7.49,16.8 7.49,16 6.78,15.29 5.31,15.29 4.72,14.71 4.72,13.39 2.51,11.18 2.51,10.26 J6.4
IO1: length 45.8
  BOTTOM w0.203: J6.5 1.78,12.06 2.57,12.06 4.32,13.81 4.32,14.87 5.14,15.7 6.53,15.7 7.09,16.26 7.09,16.97 7.75,17.63 7.75,18.92 5.41,21.26 5.41,24.45 6.2,25.24 6.2,39.71 5.41,40.49 5.41,44.94 6.34,45.87 10.11,45.87 10.69,45.29 U1.40
LED_A: length 56.8
  TOP w0.203: v1(26.91,36.28) 27.67,36.28 28.24,36.86 41.88,36.86 v1(42.19,37.16)
  BOTTOM w0.203: v1(42.19,37.16) 41.84,37.51 41.84,38.42 41.19,39.07 40.82,39.07 40.58,39.31 40.58,40.52 39.66,41.43 38.11,41.43 37.71,41.84 35.56,41.84 35.13,42.27 34.36,42.27 33.99,42.64 33.99,50.72 32.9,51.81 32.9,53.26 32.38,53.77 17.93,53.77 17.06,52.89 U1.55 ; R19.2 v1(26.91,36.28)
LED_B: length 40.5
  BOTTOM w0.203: U1.56 17.56,52.76 18.16,53.37 32.08,53.37 32.49,52.95 32.49,51.61 33.58,50.52 33.58,42.47 34.19,41.86 34.97,41.86 35.39,41.43 37.54,41.43 37.95,41.03 39.49,41.03 40.17,40.35 40.17,39.14 40.65,38.66 41.02,38.66 41.43,38.25 41.43,36.43 41.29,36.28 R20.2
LED_C: length 30.4
  TOP w0.203: v1(33.02,26.9) 32.68,27.24 24.04,27.24 23.8,27 23.7,27 23.62,26.92 v1(23.62,26.92)
  BOTTOM w0.203: v1(23.62,26.92) 23.62,30.99 24.97,32.33 24.97,38.37 24.35,39 24.35,40.69 25.4,41.74 25.4,43.4 24.94,43.86 24.94,44.1 24.75,44.29 U1.11 ; v1(33.02,26.9) 33.36,26.56 R21.2
LED_CTRL0: length 27
  BOTTOM w0.203: U1.3 26.38,48.29 26.56,48.11 27.23,48.11 27.94,47.4 27.94,43.67 27.03,42.75 27.03,41.37 27.37,41.03 29.69,41.03 30.1,40.61 30.1,39.24 30.63,38.71 31.55,38.71 31.75,38.51 31.75,36.65 31.9,36.5 31.9,32.51 31.47,32.08 29.77,32.08 29.48,32.37 R15.2
LED_CTRL1: length 29.1
  TOP w0.203: v1(27.14,49.05) 26.9,49.29 26.9,50.42 27.31,50.83 30.07,50.83 30.88,50.01 v1(31.9,50.01)
  BOTTOM w0.203: v1(31.9,50.01) 32.36,49.56 32.36,41.97 32.97,41.36 32.97,40.56 32.77,40.36 32.77,39.27 32.16,38.66 32.16,36.82 32.31,36.67 32.31,33.07 32.46,32.92 R16.2 ; U1.2 26.88,48.79 v1(27.14,49.05)
LED_CTRL2: length 43.6
  BOTTOM w0.203: U1.57 18.06,52.62 18.39,52.96 31.91,52.96 32.09,52.79 32.09,51.44 33.17,50.35 33.17,42.3 34.02,41.45 34.8,41.45 35.23,41.03 37.37,41.03 37.74,40.65 37.74,39.21 39.34,37.6 39.34,32.59 38.84,32.08 37.06,32.08 36.89,32.25 R17.2
LED_CTRL3: length 41.4
  TOP w0.203: v1(24.74,28.05) 25.13,27.66 36.98,27.66 v1(37.24,27.41)
  BOTTOM w0.203: U1.5 26.88,47.29 27.13,47.04 27.13,44 26.21,43.09 26.21,41.4 25.16,40.35 25.16,39.33 25.78,38.71 25.78,32 24.74,30.96 v1(24.74,28.05) ; R18.2 38.32,23.38 37.57,24.13 37.57,24.94 37.24,25.27 v1(37.24,27.41)
LED_CTRL4: length 44
  TOP w0.203: v1(30.2,20.78) 29.82,21.16 25.38,21.16 24.18,19.96 21.89,19.96 v1(21.59,19.66)
  BOTTOM w0.203: v1(30.2,20.78) R14.2 ; U1.6 26.52,46.79 26.72,46.59 26.72,44.17 25.81,43.26 25.81,41.57 24.75,40.52 24.75,39.16 25.37,38.54 25.37,32.17 24.03,30.82 24.03,27.49 24.31,27.21 24.31,26.54 23.8,26.04 22.53,26.04 21.34,24.84 21.34,19.91 v1(21.59,19.66)
LED_D: length 25.3
  TOP w0.203: v1(28.21,26.56) 27.19,26.56 26.92,26.83 26.01,26.83 25.42,26.24 22.02,26.24 21.02,25.25 19,25.25 v1(18.44,25.81)
  BOTTOM w0.203: R22.2 v1(28.21,26.56) ; v1(18.44,25.81) 17.96,26.28 17.96,33.22 18.06,33.32 U1.24
LED_DOT: length 47.9
  TOP w0.203: v1(31.29,51.82) 31.01,52.1 18.38,52.1 v1(16.56,50.27)
  BOTTOM w0.203: v1(31.29,51.82) 31.29,51.66 32.77,50.18 32.77,42.13 33.85,41.05 34.39,41.05 35.23,40.21 35.23,39.27 34.98,39.01 34.98,38.18 35.23,37.92 35.23,36.58 35.59,36.22 35.59,34.53 35.38,34.33 35.38,32.21 35.18,32 33.02,32 32.61,31.6 32.61,28.93 32.28,28.6 32.28,26.85 31.99,26.56 R26.2 ; U1.54 v1(16.56,50.27)
LED_E: length 24.5
  TOP w0.203: v1(17.78,24.84) 21.19,24.84 22.18,25.83 25.98,25.83 v1(26.29,26.14)
  BOTTOM w0.203: U1.25 17.56,25.09 17.78,24.87 v1(17.78,24.84) ; v1(26.29,26.14) 26.21,26.07 26.21,26.48 R23.2
LED_F: length 20.2
  TOP w0.203: v1(31.11,46.84) 25.91,46.84 25.32,46.25 22.5,46.25 21.74,47.02 20.95,47.02 v1(20.62,47.35)
  BOTTOM w0.203: R24.2 31.24,43.01 31.45,43.22 31.45,46.51 v1(31.11,46.84) ; U1.62 20.56,50.58 20.65,50.49 20.65,49.94 21.37,49.22 21.37,48.47 21.23,48.34 21.23,47.96 v1(20.62,47.35)
LED_G: length 40.5
  TOP w0.203: v1(32.23,41.12) 32.55,40.81 32.55,39.61 33.68,38.48 v1(35.66,38.48) ; v1(20.62,48.82) 20.62,48.39 21.59,47.42 21.91,47.42 22.67,46.66 25.15,46.66 25.27,46.78 25.27,46.78 25.74,47.24 30.4,47.24 30.89,47.73 v1(31.67,47.73)
  BOTTOM w0.203: v1(35.66,38.48) 35.66,36.8 35.99,36.47 35.99,34.37 35.79,34.16 35.79,32.04 35.26,31.51 35.26,27.46 36.16,26.56 R25.2 ; v1(32.23,41.12) 31.95,41.4 31.95,47.5 31.72,47.73 v1(31.67,47.73) ; v1(20.62,48.82) 20.62,49.33 20.24,49.72 20.24,50.32 20.06,50.51 U1.61
LIGHT_SENSOR: length 49.7
  TOP w0.203: J6.3 1.4,6.58 2.82,8 2.82,9.14 4.39,10.72 v1(16.41,10.72)
  BOTTOM w0.203: U1.20 20.06,33.53 20.22,33.37 20.22,32.17 20.5,31.89 20.5,25.76 20.04,25.3 20.04,15.93 19.48,15.37 16.87,15.37 16.41,14.91 v1(16.41,10.72)
N15651594_RF: length 3.2
  TOP w1.016: U3.1 1.51,27.42 T1.1
  BOTTOM w1.016: U2.3 2.36,28.75 1.52,27.91 T1.1
N15651594_RF1: length 1.4
  BOTTOM w1.016: U7.1 43.98,50.41 U6.3
N15651640_RF: length 16.8
  TOP w0.203: v1(11.3,32.54) 5.87,32.54 4.11,34.29 4.11,40.44 3.51,41.04 U3.15
  BOTTOM w0.203: 12,32.51 R5.1 v1(11.3,32.54)
N15651640_RF1: length 5.8
  TOP w0.203: R34.1 49.26,36.88 v1(48.42,36.88)
  BOTTOM w0.203: v1(48.42,36.88) 45.98,34.44 U7.15
N15651662_RF: length 8.5
  TOP w0.203: U3.3 5.51,27.04 5.88,27.41 8.13,27.41 9.37,28.65 v1(10.79,28.65)
  BOTTOM w0.203: v1(10.79,28.65) 10.87,28.57 11.11,28.57 R7.1
N15651662_RF1: length 6.6
  BOTTOM w0.203: U7.3 47.98,49.12 49.89,51.03 51.46,51.03 51.82,51.38 51.82,52.06 R38.1
N15651688_RF: length 5.6
  TOP w0.203: U3.4 9.03,27.69 v1(10.39,27.69)
  BOTTOM w0.203: R6.1 11.75,27.69 v1(10.39,27.69) 10.24,27.69 10.13,27.58
N15651688_RF1: length 4.1
  BOTTOM w0.203: U7.4 49.99,49.01 49.99,50.06 50.52,50.6 51.88,50.6 R37.1
N15651780_RF: length 5.4
  TOP w0.203: U3.6 11.51,29.21 v1(11.14,29.58)
  BOTTOM w0.203: R8.2 11.14,30.13 v1(11.14,29.58)
N15651780_RF1: length 12.4
  TOP w0.203: R39.2 50.84,38.43 v1(51.71,38.43)
  BOTTOM w0.203: U7.6 53.98,42.17 51.71,39.9 v1(51.71,38.43)
N15651834_RF: length 1.9
  TOP w0.203: U3.7 v1(13.51,27)
  BOTTOM w0.203: R6.2 13.51,27.85 v1(13.51,27)
N15651834_RF1: length 3
  BOTTOM w0.203: U7.7 55.98,49.23 54.14,51.07 R37.2
N15651858_RF: length 4.1
  TOP w0.203: U3.8 15.51,26.35 v1(14.88,26.97)
  BOTTOM w0.203: R7.2 14.38,28.74 14.38,27.46 14.86,26.97 v1(14.88,26.97)
N15651858_RF1: length 8.1
  TOP w0.203: v1(58.88,49.53) 55.93,49.53 54.41,51.05 v1(54.41,52.32)
  BOTTOM w0.203: U7.8 58.51,49.53 v1(58.88,49.53) ; v1(54.41,52.32) 54.14,52.59 R38.2
OUT_SEN1: length 46.4
  TOP w0.203: J2.9 62.64,51.56 62.64,49.6 62.23,49.19 62.23,47.4 61.77,46.94 57.25,46.94 56.36,46.05 47.52,46.05 46.05,44.58 41.12,44.58 39.57,46.13 26.19,46.13 v1(26.01,45.95)
  BOTTOM w0.203: U1.8 25.01,45.79 25.17,45.95 v1(26.01,45.95)
OUT_SEN2: length 44.6
  TOP w0.203: v1(25.48,45.11) 26.58,45.11 27.19,45.72 39.4,45.72 40.95,44.17 46.22,44.17 47.69,45.64 56.53,45.64 57.42,46.53 62.1,46.53 62.64,47.07 62.64,49.02 J2.8
  BOTTOM w0.203: U1.9 25.29,45.29 v1(25.48,45.11)
OUT_SEN3: length 43
  TOP w0.203: J2.7 62.28,46.13 57.59,46.13 56.7,45.24 47.86,45.24 46.39,43.76 40.79,43.76 39.24,45.31 27.36,45.31 26.19,44.15 v1(25.63,44.15)
  BOTTOM w0.203: U1.10 24.82,44.79 25.47,44.15 v1(25.63,44.15)
OUT_SEN4: length 45.6
  TOP w0.203: J2.6 62.76,45.14 62.18,45.72 57.76,45.72 56.87,44.83 48.03,44.83 46.56,43.36 40.62,43.36 39.07,44.91 30.76,44.91 29.18,43.33 27.28,43.33 26.52,42.57 23.31,42.57 23.11,42.77 v1(22.48,42.77)
  BOTTOM w0.203: U1.14 22.7,42.79 22.68,42.77 v1(22.48,42.77)
R: length 33.5
  BOTTOM w0.203: J6.9 1.62,21.82 5.38,25.58 5.38,39.37 4.6,40.16 4.6,45.34 6.05,46.79 U1.43
RELAY1: length 62.3
  TOP w0.203: v1(15.56,53.25) 16.05,52.76 16.9,52.76 17.45,53.31 34.95,53.31 35.23,53.04 v1(35.43,53.04) ; v1(57.25,40.01) 56.06,40.01 55.58,40.49 41.23,40.49 38.87,42.85 v1(38,42.85)
  BOTTOM w0.203: v1(35.43,53.04) 35.28,52.88 35.28,45.98 37.01,44.26 37.01,43.41 37.57,42.85 v1(38,42.85) ; J2.3 63.17,38.18 63.17,39.01 62.31,39.88 57.38,39.88 v1(57.25,40.01) ; U1.52 v1(15.56,53.25)
RELAY2: length 65.7
  TOP w0.203: v1(34.47,52.63) 34.24,52.63 33.96,52.91 17.62,52.91 17.06,52.35 15.5,52.35 15.46,52.38 14.55,53.28 v1(14.55,53.37) ; v1(36.27,43.79) 36.65,43.79 37.31,43.13 37.31,42.57 37.71,42.16 38.98,42.16 41.06,40.08 55.41,40.08 56.27,39.22 v1(56.31,39.22)
  BOTTOM w0.203: v1(36.27,43.79) 36.27,44.42 34.87,45.82 34.87,52.22 v1(34.47,52.63) ; v1(14.55,53.37) 14.55,53.14 15.06,52.63 15.06,51.54 U1.51 ; J2.2 62.63,36.18 62.63,38.87 62.03,39.47 57.69,39.47 57.43,39.22 v1(56.31,39.22)
RELAY3: length 69.5
  TOP w0.203: v1(36.58,42.84) 36.58,42.72 37.55,41.76 38.81,41.76 40.89,39.67 54.84,39.67 55.3,39.22 v1(55.3,39.22) ; v1(13.36,53.39) 14.07,52.68 14.58,52.68 15.2,52.07 15.37,51.94 17.23,51.94 17.79,52.5 33.38,52.5 33.58,52.3 v1(33.58,52.2)
  BOTTOM w0.203: U1.50 14.56,52.48 14.35,52.68 13.94,52.68 13.36,53.26 v1(13.36,53.39) ; v1(55.3,39.22) 55.34,39.22 56.03,38.53 56.6,38.53 56.87,38.8 56.92,38.81 57.6,38.81 57.86,39.07 61.8,39.07 62.22,38.64 62.22,34.04 J2.1 ; v1(36.58,42.84) 36.23,42.84 35.59,43.48 35.59,44.53 34.47,45.65 34.47,51.46 33.73,52.2 v1(33.58,52.2)
RELAY4: length 60.5
  TOP w0.203: v1(36.32,53.44) 36.12,53.44 35.84,53.72 16.89,53.72 v1(16.61,53.44) ; v1(37.72,43.79) 38.5,43.79 41.4,40.89 56.18,40.89 v1(56.36,40.72)
  BOTTOM w0.203: v1(56.36,40.72) 56.36,40.72 57.53,40.72 57.94,40.31 63.58,40.31 J2.4 ; v1(36.32,53.44) 36.32,52.78 35.69,52.15 35.69,46.15 37.74,44.1 37.74,43.81 v1(37.72,43.79) ; v1(16.61,53.44) 16.61,53.29 16.06,52.73 U1.53
RF1_IO0: length 32.7
  TOP w0.203: v1(4.46,47.56) 4.39,47.49 4.39,46.27 4.52,46.15 4.52,34.46 6.04,32.94 10.56,32.94 10.84,33.22 13.59,33.22 v1(13.63,33.19)
  BOTTOM w0.203: v1(4.46,47.56) 4.48,47.56 4.71,47.79 U1.45 ; R5.2 v1(13.63,33.19) ; R5.2 13.65,32.51 ; R5.2 R8.1
RF1_IO1: length 11.7
  TOP w0.203: v1(5.16,46.89) 5.16,45.01 5.51,44.66 U3.14
  BOTTOM w0.203: U1.44 5.56,47.29 v1(5.16,46.89)
RF2_IO0: length 47.3
  TOP w0.203: R39.1 50.71,36.84 50.01,37.54 50.01,37.97 49.54,38.44 R34.2 48.02,38.44 47.65,38.07 47.65,36.83 47.27,36.45 28.41,36.45 24.93,32.97 20.04,32.97 19.46,33.55 18.75,33.55 17.4,32.21 15.9,32.21 v1(15.8,32.11)
  BOTTOM w0.203: U1.28 16.06,32.36 v1(15.8,32.11)
RF2_IO1: length 44
  TOP w0.203: v1(16.37,30.68) 16.93,31.24 17.71,31.24 18.6,30.35 20.26,30.35 20.85,30.94 25.78,30.94 29.26,34.42 47.52,34.42 47.98,33.96 v1(47.98,33.94)
  BOTTOM w0.203: v1(16.37,30.68) 16.56,30.87 U1.27 ; U7.14 v1(47.98,33.94)
SPI1_MISO: length 46.8
  TOP w0.203: v1(55.98,33.75) 55.24,34.49 52.85,34.49 52.43,34.92 51.12,34.92 49.99,36.04 28.57,36.04 25.1,32.56 19.43,32.56 19.15,32.84 v1(19.13,32.84)
  BOTTOM w0.203: U7.10 v1(55.98,33.75) ; v1(19.13,32.84) 19.06,32.91 U1.22
SPI1_MOSI: length 46.3
  TOP w0.203: v1(53.98,33.8) 52.97,33.8 52.26,34.51 50.95,34.51 49.83,35.64 28.75,35.64 25.27,32.16 19.3,32.16 18.93,31.78 v1(18.91,31.78)
  BOTTOM w0.203: v1(18.91,31.78) 18.92,31.78 18.44,32.26 18.44,33.13 18.56,33.24 U1.23 ; U7.11 v1(53.98,33.8)
SPI1_SCK: length 43.3
  TOP w0.203: v1(51.98,33.82) 51.06,33.82 49.66,35.23 28.92,35.23 25.44,31.75 20.12,31.75 v1(19.81,31.45)
  BOTTOM w0.203: v1(19.81,31.45) 19.81,33.2 19.56,33.45 U1.21 ; U7.12 v1(51.98,33.82)
SPI1_SS: length 46.7
  TOP w0.203: v1(15.16,31.39) 15.16,31.39 15.17,31.39 16.08,31.39 16.33,31.65 17.88,31.65 18.77,30.76 20.1,30.76 20.68,31.34 25.61,31.34 29.09,34.82 49.03,34.82 v1(49.98,33.87)
  BOTTOM w0.203: v1(15.16,31.39) 15.06,31.48 15.06,32.41 15.56,32.9 U1.29 ; U7.13 v1(49.98,33.87)
SPI2_MISO: length 2.8
  TOP w0.203: U3.10 13.51,42.17 v1(13.51,43.13)
  BOTTOM w0.203: U1.35 13.18,42.79 v1(13.51,43.13)
SPI2_MOSI: length 6.9
  TOP w0.203: U3.11 10.24,43.43 v1(8.51,43.43)
  BOTTOM w0.203: v1(8.51,43.43) 8.65,43.29 U1.36
SPI2_SCK: length 3.7
  TOP w0.203: U3.12 9.47,42.13 v1(9.47,41.27)
  BOTTOM w0.203: v1(9.47,41.27) 10.49,42.29 U1.34
SPI2_SS: length 6
  TOP w0.203: U3.13 8.31,41.37 v1(8.31,40.93)
  BOTTOM w0.203: U1.33 10.73,41.79 10.46,41.53 10.46,41.05 10.01,40.59 8.64,40.59 v1(8.31,40.93)
SWCLK: length 16.8
  BOTTOM w0.203: J1.1 2.18,52.1 2.18,51.33 3.01,50.51 R4.1 3,50.38 3,49.48 3.2,49.28 5.07,49.28 5.65,48.7 9,48.7 10.24,49.94 13.26,49.94 14.06,50.73 U1.49
SWDIO: length 14.7
  TOP w0.203: v1(3.01,52.6) 3.01,51.55 J1.2
  BOTTOM w0.203: U1.46 5.48,48.29 4.9,48.87 2.88,48.87 J1.2 ; v1(3.01,52.6) R3.1
UART_RX: length 49.4
  TOP w0.203: J6.7 2.79,16.74 3.12,16.41 7.47,16.41 8.31,17.25 9.22,17.25 9.57,16.89 13.82,16.89 14.81,17.88 16.12,17.88 17.11,16.89 20.29,16.89 v1(20.75,17.35)
  BOTTOM w0.203: v1(20.75,17.35) 20.75,18.95 20.45,19.26 20.45,25.14 20.9,25.59 20.9,32.05 20.62,32.33 20.62,33.13 22.62,35.13 23.67,35.13 24.13,35.59 24.13,37.73 23.53,38.33 23.53,39.99 22.99,40.54 21.87,40.54 21.56,40.22 U1.17
UART_TX: length 51.8
  TOP w0.203: v1(21.67,16.87) 21.29,16.48 16.94,16.48 15.95,17.48 14.98,17.48 13.99,16.48 9.4,16.48 9.05,16.84 8.48,16.84 7.64,16 2.36,16 1.7,15.34 1.7,14.53 J6.6
  BOTTOM w0.203: U1.16 23.32,41.79 23.11,41.59 23.11,40.99 23.94,40.16 23.94,38.5 24.54,37.9 24.54,35.42 23.83,34.72 22.79,34.72 21.03,32.96 21.03,32.51 21.31,32.23 21.31,25.43 20.85,24.97 20.85,19.43 21.67,18.61 v1(21.67,16.87)
ZDET: length 47.7
  TOP w0.203: v1(22.33,41.63) 22.86,42.16 26.69,42.16 27.45,42.93 29.35,42.93 30.93,44.5 38.9,44.5 40.45,42.95 46.72,42.95 48.2,44.42 57.04,44.42 57.93,45.31 61.9,45.31 62.71,44.5 62.71,43.71 J2.5
  BOTTOM w0.203: v1(22.33,41.63) 22.99,42.29 U1.15
N00082: length 32.9
  TOP w0.203: D1.2 15.93,22.07 21.21,22.07 21.98,22.84 21.98,24.67 22.73,25.43 27.4,25.43 v1(27.7,25.73)
  BOTTOM w0.203: v1(27.7,25.73) 27.46,25.97 27.46,28.47 27.69,28.7 27.69,35.15 28.29,35.76 28.29,37.35 27.75,37.88 R19.1 27.53,38.55 U4.11
N00088: length 27.7
  TOP w0.203: v1(44.91,24.08) 44.91,22.86 45.44,22.33 49.51,22.33 D2.2
  BOTTOM w0.203: 39.75,37.88 R20.1 ; 39.75,37.88 39.75,32.49 40.31,31.93 40.31,29.24 44.91,24.64 v1(44.91,24.08) ; 39.75,37.88 39.75,39.13 U4.7
N00094: length 15.7
  TOP w0.203: v1(35.31,24.33) 35.31,22.76 35.81,22.25 40.06,22.25 D3.2
  BOTTOM w0.203: U4.4 33.78,29.55 R21.1 34.51,28.16 34.67,27.99 34.67,24.97 v1(35.31,24.33)
N00100: length 8.8
  BOTTOM w0.203: U4.2 28.78,29.64 R22.1 29.45,28.16 29.77,27.84 29.77,24.89 30.18,24.49 32.26,24.49 D4.2
N00106: length 9
  BOTTOM w0.203: U4.1 26.29,29.68 R23.1 26.89,28.16 27.05,27.99 27.05,25.93 26.37,25.25 24.31,25.25 D5.2
N00112: length 1.6
  BOTTOM w0.203: R24.1 31.14,40.12 U4.10
N00118: length 1.6
  BOTTOM w0.203: U4.5 36.27,29.51 R25.1
N15478798: length 8.2
  TOP w0.508: B1.2 60.55,42.24 60.55,40.08 D6.1 58.83,39.75 57.77,38.69 Q6.3
N15478854: length 3.1
  TOP w0.203: R35.2 R36.1 55.59,35.13 Q6.1
N15504963: length 4.7
  TOP w0.203: v1(29.64,38.63) 29.57,38.71 27.47,38.71 U4.12
  BOTTOM w0.203: Q1.3 30.27,38.01 v1(29.64,38.63)
N15504972: length 1.9
  BOTTOM w0.203: Q2.3 33.95,39.85 U4.9
N15505070: length 2.3
  BOTTOM w0.203: U4.8 36.47,39.16 Q3.3
N15505077: length 1.5
  BOTTOM w0.203: Q4.3 39.05,29.67 U4.6
N15565455: length 2.9
  BOTTOM w0.203: R15.1 R9.2 31.22,34.58 Q1.1
N15565519: length 2.9
  BOTTOM w0.203: Q2.1 34.9,34.61 R10.2 R16.1
N15565583: length 2.8
  BOTTOM w0.203: Q3.1 38.58,34.53 R11.2 R17.1
N15565649: length 2.8
  BOTTOM w0.203: Q4.1 39.92,25.87 R12.2 R18.1
N15566232: length 2.9
  BOTTOM w0.203: R14.1 R13.2 28.59,23.29 27.56,23.29 Q5.1
N15566328: length 40.1
  TOP w0.203: D2.1 D3.1 D4.1 D5.1 D1.1
  BOTTOM w0.203: Q5.3 25.12,21.84 24.89,21.62 D5.1
N15566838: length 1.6
  BOTTOM w0.203: R26.1 31.28,29.6 U4.3
N15629265: length 64
  TOP w0.203: v1(11.3,35.15) 12.52,33.93 13.85,33.93 14.41,33.38 17.99,33.38 18.58,33.96 19.62,33.96 20.21,33.38 24.76,33.38 26.23,34.84 26.23,36.57 26.92,37.26 41.12,37.26 41.71,37.85 42.47,37.85 43.46,36.86 46.89,36.86 47.24,37.21 47.24,38.24 48.25,39.24 53.16,39.24 53.73,38.67 R35.1
  BOTTOM w0.203: U1.41 12.98,45.79 13.18,45.59 13.18,44.43 14.2,43.41 14.2,42.7 11.3,39.8 v1(11.3,35.15)
N15629501: length 57.2
  TOP w0.203: v1(48.77,30.76) 49.17,30.76 49.68,31.27 U5.5 ; v1(18.63,49.38) 18.63,50.84 19.07,51.28 30.18,51.28 30.74,50.72 35.9,50.72 36.41,50.22 36.78,50.22 37.06,49.94 38.15,49.94 v1(38.18,49.91)
  BOTTOM w0.203: v1(48.77,30.76) R32.2 48.43,31.45 48.28,31.6 46.1,31.6 45.45,30.95 43.3,30.95 42.95,31.3 42.95,34.39 44.96,36.4 44.96,44.68 42.8,46.84 39.04,46.84 38.18,47.7 v1(38.18,49.91) ; v1(18.63,49.38) 18.87,49.62 18.87,50.3 19.01,50.44 19.02,50.51 19.06,50.54 U1.59
N15629505: length 57.5
  TOP w0.203: v1(37.41,50.62) 36.58,50.62 36.07,51.13 30.91,51.13 30.35,51.69 18.59,51.69 17.88,50.98 v1(17.88,50.14) ; v1(48.87,29.26) 49.61,30 U5.6
  BOTTOM w0.203: v1(48.87,29.26) 48.45,29.26 R33.2 48.43,29.8 48.22,30 46.14,30 45.6,30.54 43.13,30.54 42.55,31.13 42.55,34.56 44.55,36.57 44.55,44.51 42.63,46.43 38.87,46.43 37.77,47.53 37.77,49.17 37.49,49.45 37.49,50.55 v1(37.41,50.62) ; U1.58 18.56,50.56 18.14,50.14 v1(17.88,50.14)
N15649130: length 1.8
  TOP w0.203: U5.1 57.06,27.46 Y1.2
N15649228: length 1.8
  TOP w0.203: Y1.1 57.09,28.73 U5.2
N15649288: length 6.6
  TOP w0.508: J3.1 58.52,30.94 58.01,30.43 57.28,30.43 56.85,30 U5.3
  BOTTOM w0.508: C16.1 59.11,29.91 59.54,30.34 J3.1
N15675820: length 4.3
  TOP w0.203: R1.2 21.32,45.34 v1(21.58,45.59) 21.32,45.85 C13.2
  BOTTOM w0.203: U1.7 22.28,46.29 v1(21.58,45.59)

## Copper pours and planes (outline as drawn; the poured copper is in the pictures)
GND on TOP: 0.38,0.38 0.38,53.87 64.85,53.87 64.85,26.26 60.71,26.26 60.05,25.6 60.05,0.38 ; 16 cut-outs
GND on BOTTOM: 0.38,0.38 0.38,53.87 64.85,53.87 64.85,26.26 60.71,26.26 60.05,25.6 60.05,0.38 ; 16 cut-outs

Small or netless copper shapes (teardrops, artwork), in the pictures only: 255 on TOP, 333 on BOTTOM

## Text on the board
Ref Des/Silkscreen Bottom: Designed by HTR | HTR
Ref Des/Silkscreen Top: 3.3V | RX2 | TX2 | IO1 | TX1 | IO0 | ADC | GND | RX1 | Version | Date | Name | Designed by HTR | MAIN AC CTRL | Hw01 | 10/2025 | - | + | HTR
PLACE_BOUND_BOTTOM: FIGURE | FINISHED_SIZE | 15.0 | 23.622 | 26.0 | 39.402 | 40.0 | 41.339 | 42.0 | 45.0 | 60.0 | 125.98 | DRILL CHART: TOP to BOTTOM | ALL UNITS ARE IN MILS | PLATED | QTY | 334 | 2 | 5 | 20 | 12 | 3 | 16 | 1 | 4
